# EAGLE board Gun_Trigger (EAGLE 7.6.0)
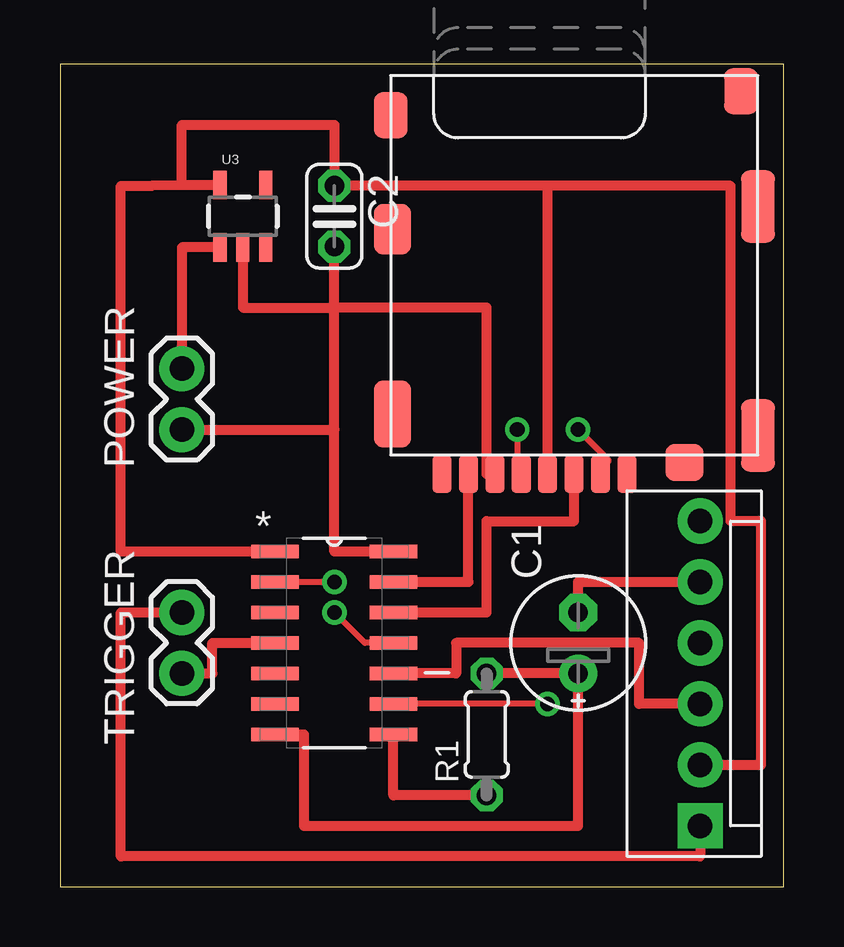
[diagram p0: board, top side]
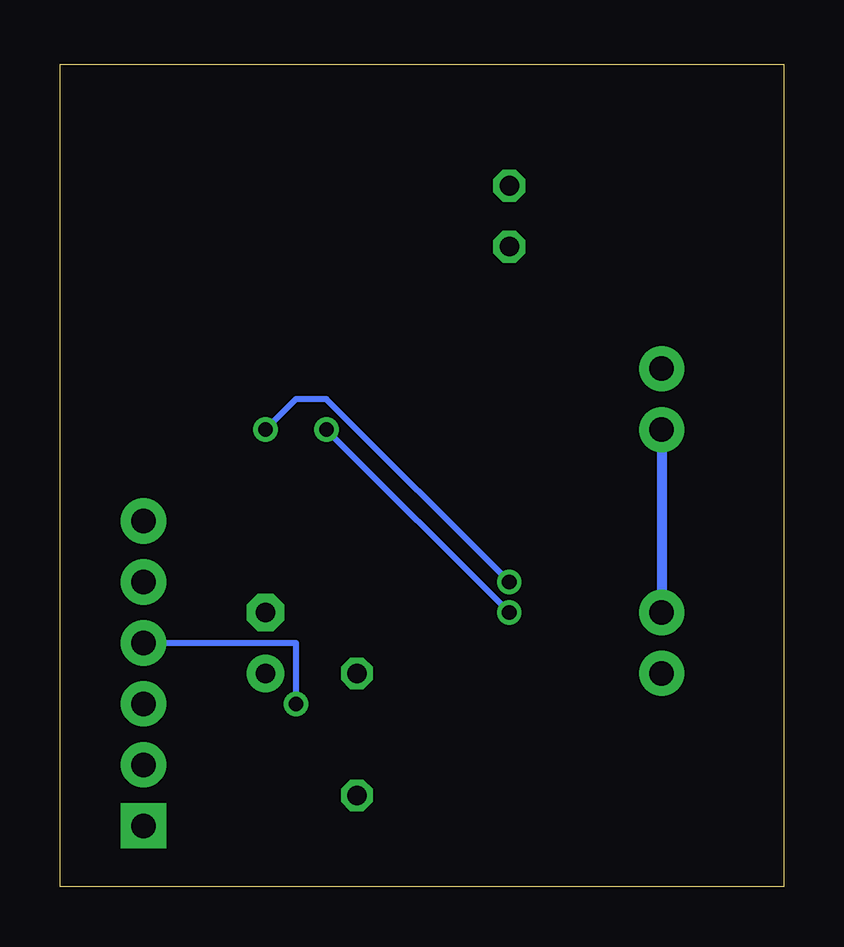
[diagram p1: board, bottom side, seen from below]

Size 30.15 x 34.28 mm. Coordinates in mm from the lower left corner, seen from the top.
Outline: 0,0 30.15,0 30.15,34.28 0,34.28 0,0
Copper layers (1*16): Top 0.035mm / dielectric 1.5mm / Bottom 0.035mm
Design rules "default": minimum track width 10mil, minimum drill 24mil, track to track 8mil, track to pad 8mil, pad to pad 8mil, via to via 8mil, smd to smd 8mil, copper to edge 40mil, drill to drill 8mil, minimum pad ring 10mil, minimum via ring 8mil, stop-mask expansion 4mil, vias tented up to drill 0mil, thermal gap 10mil

## Footprints (pad centres in the part's own frame; a part is rotated, then mirrored left to right if it is on the bottom)
MOLEX-1X6 = drill 1.016 pad 1.88 square: 1 0,0 | drill 1.016 pad 1.88: 2 2.54,0; 3 5.08,0; 4 7.62,0; 5 10.16,0; 6 12.7,0
E2,5-6E = drill 0.813 pad 1.575: + -1.27,0 | drill 0.813 pad 1.575 octagon: - 1.27,0
C025-024X044 = drill 0.813 octagon: 1 -1.27,0; 2 1.27,0
SOIC127P600X175-14N = smd 1.981 x 0.559: 1 -2.464,3.81; 2 -2.464,2.54; 3 -2.464,1.27; 4 -2.464,0; 5 -2.464,-1.27; 6 -2.464,-2.54; 7 -2.464,-3.81; 8 2.464,-3.81; 9 2.464,-2.54; 10 2.464,-1.27; 11 2.464,0; 12 2.464,1.27; 13 2.464,2.54; 14 2.464,3.81
1X02 = drill 1.016 pad 1.88: 1 0,0; 2 2.54,0
0204/5 = drill 0.813 octagon: 1 -2.54,0; 2 2.54,0
SOT23-5 = smd 0.55 x 1.2: 1 -0.95,-1.3; 2 0,-1.3; 3 0.95,-1.3; 4 0.95,1.3; 5 -0.95,1.3
MICRO_SD_CONNECTOR = smd 0.8 x 1.6: 1 -2.03,8.2; 2 -0.93,8.2; 3 0.17,8.2; 4 1.27,8.2; 5 2.37,8.2; 6 3.47,8.2; 7 4.57,8.2; 8 5.67,8.2 | smd 1.55 x 2.8: 9 7.735,5.7 | smd 1.55 x 2.1: 10 7.735,-2 | smd 1.4 x 1.9: 11 7.81,-6.75; 12 -6.79,-7.75 | smd 1.4 x 3: 13 -7.49,-2.95; 14 -7.49,6.6 | smd 1.6 x 1.55: 15 -4.43,7.725

## Placement (x,y rotation side)
AMMO  [MOLEX-1X6]  26.67,2.54 90 top
C1  [E2,5-6E]  21.59,10.16 90 top
C2  [C025-024X044]  11.43,27.94 270 top
MC  ATTINY84  [SOIC127P600X175-14N]  11.43,10.16 0 top
POWER  M02PTH  [1X02]  5.08,21.59 270 top
R1  [0204/5]  17.78,6.35 90 top
TRIGGER  M02PTH  [1X02]  5.08,11.43 270 top
U3  [SOT23-5]  7.62,27.94 0 top
U$1  MICROSD_SPI_MODE  [MICRO_SD_CONNECTOR]  21.59,25.4 180 top

## Library data of the parts
AMMO POWER TRIGGER = SparkFun-Connectors
C1 C2 = rcl
MC = Atmel_By_element14_Batch_1-00; MPN: ATTINY84; OC_FARNELL: 1636955; OC_NEWARK: 03P2040; PACKAGE: SOIC-14; SUPPLIER: Atmel
R1 = resistor
U3 = SparkFun-PowerIC; PROD_ID: VREG-00822
U$1 = con-molex-microsd

## Nets
3.3V: AMMO.2 C2.1 MC.1 U3.5 U$1.4
AMMO: AMMO.3 MC.10
GND: AMMO.1 C2.2 MC.14 POWER.2 TRIGGER.1 U3.2 U$1.6
N$1: MC.4 TRIGGER.2
N$2: MC.13 U$1.7
N$3: MC.12 U$1.3
N$4: MC.11 U$1.5
N$5: MC.2 U$1.2
N$9: MC.8 R1.1
N$10: C1.+ MC.7 R1.2
SPEAKER: AMMO.5 C1.-
TRIGGER: AMMO.4 MC.9
VCC: POWER.1 U3.1

## Tracks (layer width: path | path; a pad name or v marks a point on that pad's centre or on a via)
3.3V
  Top 0.406: U3.5 5.08,29.24 | 5.08,29.24 3.81,29.21 2.54,29.21 2.54,13.97 MC.1 | 5.08,29.24 5.08,31.75 11.43,31.75 C2.1 20.32,29.21 | U$1.4 20.32,29.21 | AMMO.2 29.21,5.08 29.21,15.24 27.94,15.24 27.94,29.21 20.32,29.21
AMMO
  Top 0.406: AMMO.3 24.13,7.62 24.13,10.16 16.51,10.16 16.51,8.89 MC.10
GND
  Top 0.406: U3.2 7.62,24.13 11.43,24.13 | 11.43,24.13 C2.2 | AMMO.1 26.67,1.27 2.54,1.27 2.54,11.43 TRIGGER.1 | U$1.6 17.78,17.2 17.78,24.13 11.43,24.13 | POWER.2 11.43,19.05 | 11.43,19.05 11.43,24.13 | MC.14 11.43,13.97 11.43,19.05
  Bottom 0.406: POWER.2 TRIGGER.1
N$1
  Top 0.406: TRIGGER.2 6.35,8.89 6.35,10.16 MC.4
N$2
  Top 0.406: MC.13 17.02,12.7 U$1.7
N$3
  Top 0.406: MC.12 17.78,11.43 17.78,15.24 21.42,15.24 U$1.3
N$4  (via drill 0.61)
  Top 0.254: v19.05,19.05 19.05,17.78 U$1.5 | v11.43,11.43 12.7,10.16 MC.11 13.97,10.16
  Bottom 0.254: v11.43,11.43 v19.05,19.05
N$5  (via drill 0.61)
  Top 0.254: v21.59,19.05 22.86,17.78 U$1.2 | v11.43,12.7 MC.2 8.89,12.7
  Bottom 0.254: v21.59,19.05 20.32,20.32 19.05,20.32 v11.43,12.7
N$9
  Top 0.406: R1.1 13.89,3.81 MC.8
N$10
  Top 0.406: MC.7 10.16,6.35 10.16,2.54 21.59,2.54 C1.+ R1.2
SPEAKER
  Top 0.406: C1.- 21.59,12.7 AMMO.5
TRIGGER  (via drill 0.61)
  Top 0.254: v20.32,7.62 MC.9
  Bottom 0.254: v20.32,7.62 20.32,10.16 AMMO.4
VCC
  Top 0.406: U3.1 5.08,26.64 POWER.1